# Altium PCB PDB_neeraj.PcbDoc
Units mm, origin at the board's own origin, x right, y up, seen from the top; angles counter-clockwise.
Board outline 75 x 55 mm, 2 copper layers (Top Layer, Bottom Layer); 45 components, 33 nets, 139 pads, 24 vias.
Unrouted connection lines stored in the file: 2.
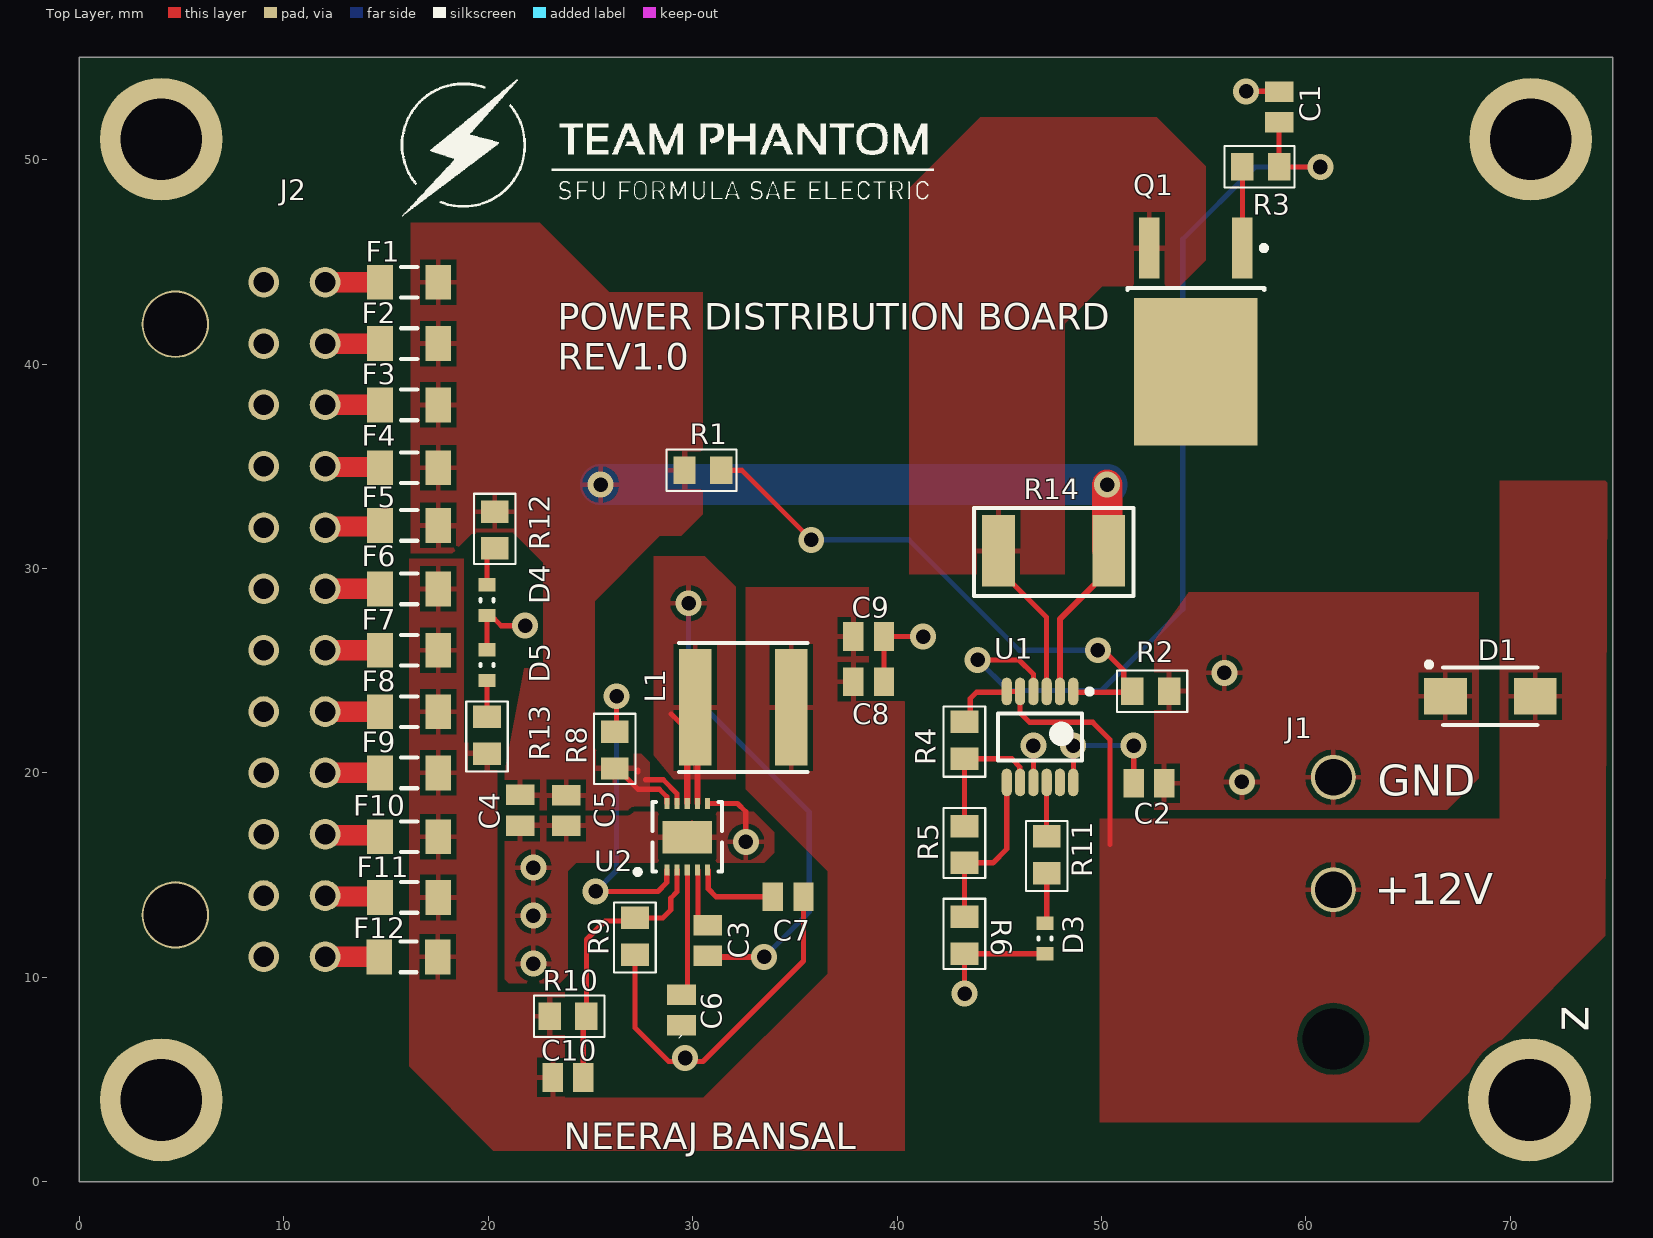
[diagram p0: Top Layer view]
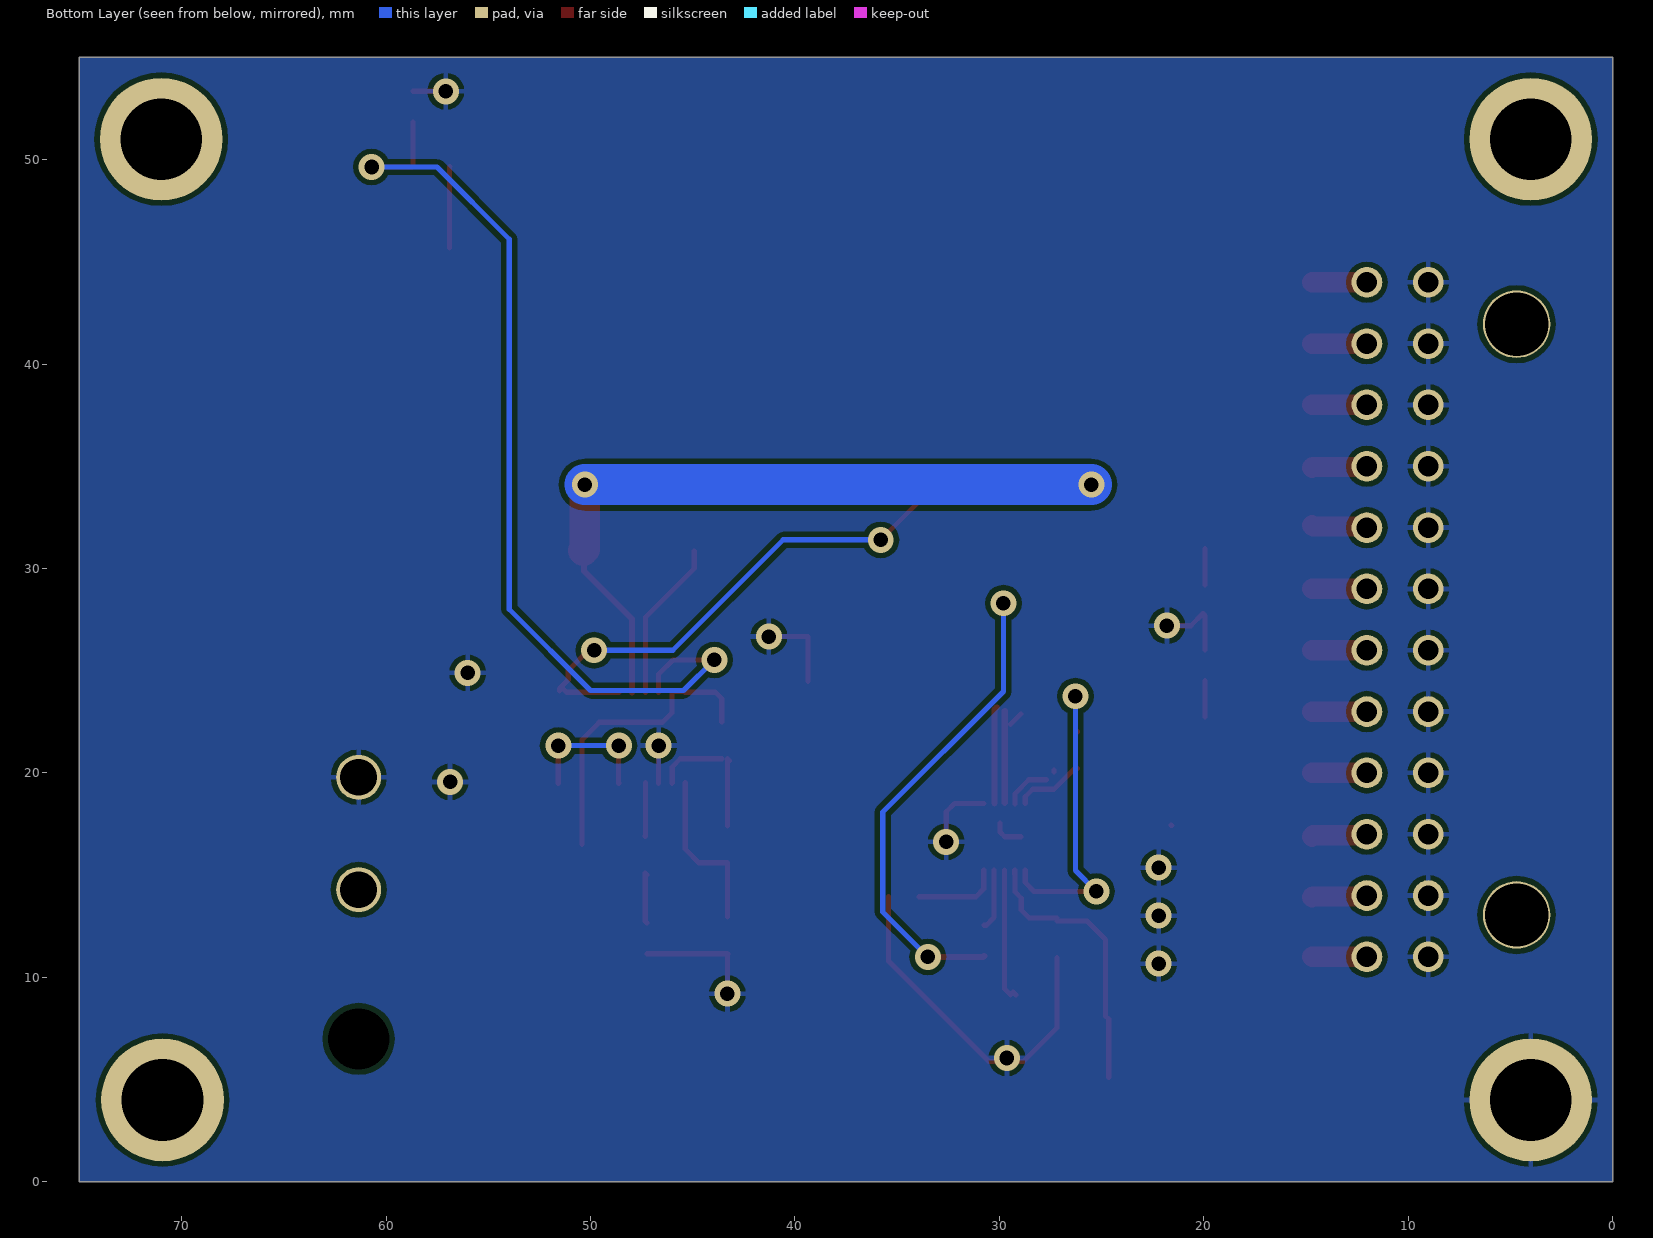
[diagram p1: Bottom Layer view, seen from below]
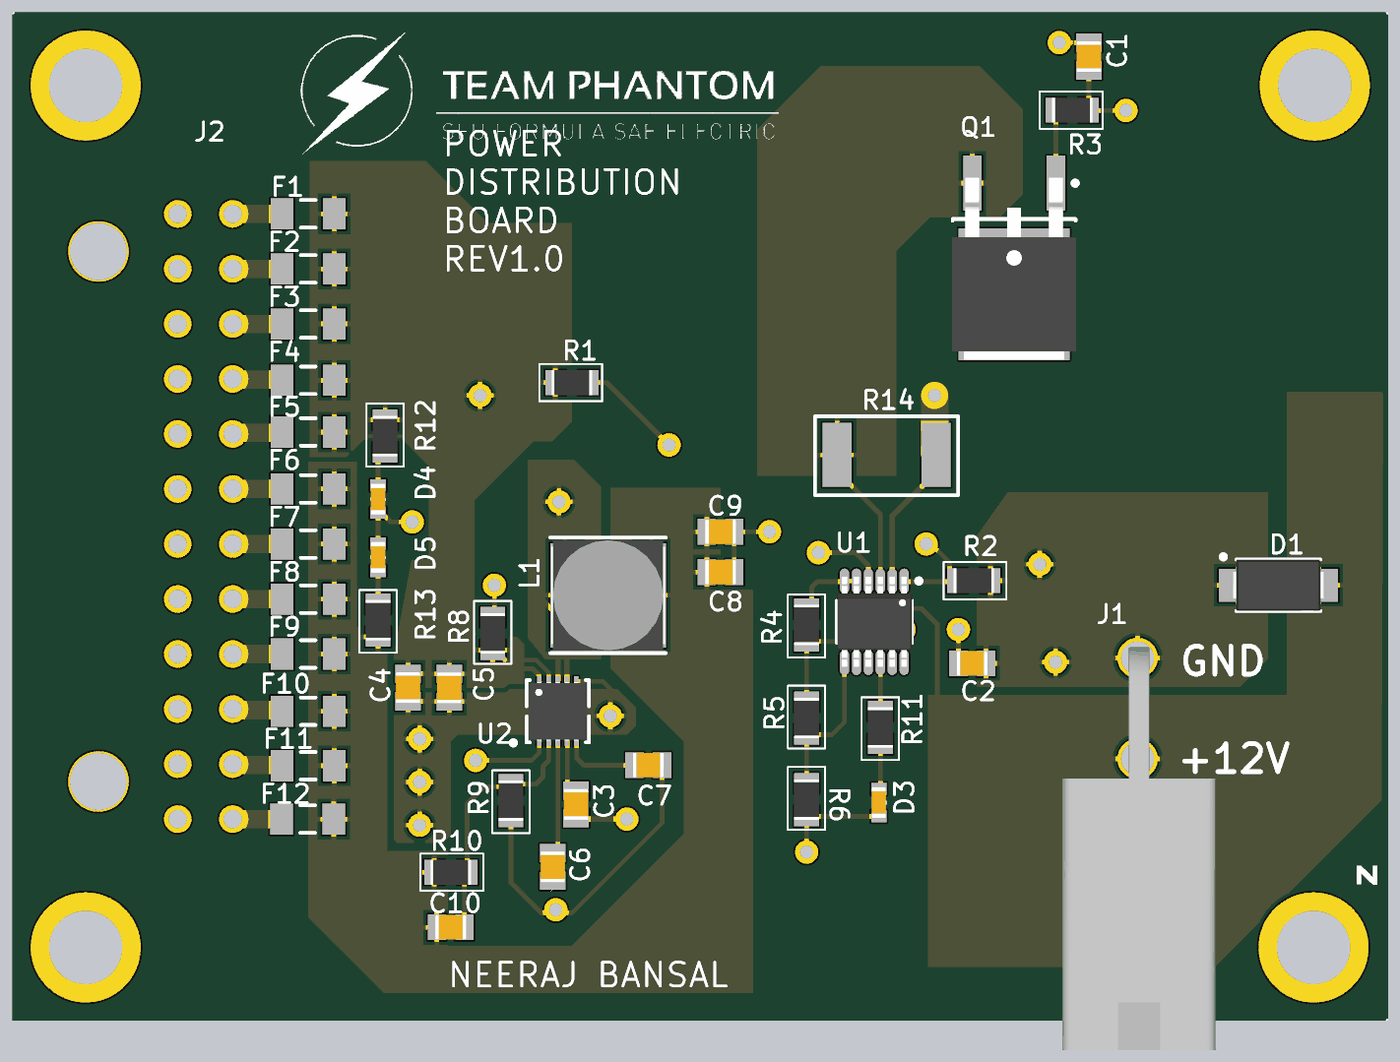
[diagram p2: 3D render of the assembled board from above, using the file's embedded part models]

## Layer stack, top to bottom
Top Solder: solder mask 0.0102, Solder Resist, Dk 3.5
Top Layer: signal copper 0.0356
Dielectric 1: dielectric 0.32, FR-4, Dk 4.8
Bottom Layer: signal copper 0.0356
Bottom Solder: solder mask 0.0102, Solder Resist, Dk 3.5

## Board outline
0,0 0,55 75,55 75,0

## Design rules (kind name [scope] priority, off if disabled: settings)
Clearance [All] p1: gap=0.254 ignorepadtopadclearanceinfootprint=TRUE except(0: Arc-Hole Track-Hole SMDPad-Hole THPad-Hole Via-Hole Fill-Hole Poly-Hole Region-Hole Text-Hole; 0.1: Arc-Arc Arc-Track Arc-SMDPad Track-Track Track-SMDPad SMDPad-SMDPad Fill-Fill Fill-Poly Fill-Region Poly-Poly Poly-Region Region-Region)
PolygonConnect [All] p1: connectstyle=Relief reliefconductorwidth=0.254 reliefentries=4 polygonreliefangle="90 Angle" airgapwidth=0.254
RoutingVias [All] p1: holewidth=0.711 width=1.27 viastyle="Through Hole" minholewidth=0.711 minwidth=1.27 maxholewidth=0.711 maxwidth=1.27
SolderMaskExpansion [All] p1: expansion=0.102
Width [All] p1: maxlimit=2 minlimit=0.254 preferedwidth=0.254 minimp=50.000000 maximp=50.000000 favimp=50.000000
30 further rules are at their usual default settings.

## Components (designator, comment, footprint, x,y, rotation, side; value= is the part's Value field where it differs from the comment)
C1 "47nF" CAPC1613X09N 58.685,52.578 r270 top
C2 "0.1uF C" CAPC1613X09N 52.324,19.492 r180 top
C3 "100nF 25V" CAPC1613X09N 30.736,11.8 r270 top
C4 "10uF" CAPC1613X09N 21.57,18.172 r90 top
C5 "10uF" CAPC1613X09N 23.822,18.161 r90 top
C6 "1uF" CAPC1613X09N 29.456,8.4 r90 top
C7 "47nF" CAPC1613X09N 34.671,13.94 r180 top
C8 "22uF 10V" CAPC1613X09N 38.608,24.466 r180 top
C9 "22uF 10V" CAPC1613X09N 38.608,26.67 r180 top
C10 "10pF" CAPC1613X09N 23.9,5.1 r180 top
D1 "TVS DIODE" DIODE_TVS 69.015,23.749 r0 top
D3 "Red" LED2 47.237,11.9 r270 top
D4 "GREEN" LED2 19.939,28.448 r270 top
D5 "GREEN" LED2 19.939,25.273 r90 top
F1 "Fuse_5A" FUSE 16.129,44 r0 top
F2 "Fuse_1A" FUSE 16.129,41 r0 top
F3 "Fuse_1A" FUSE 16.129,38 r0 top
F4 "Fuse_1A" FUSE 16.129,34.925 r0 top
F5 "Fuse_1A" FUSE 16.129,32.106 r0 top
F6 "Fuse_1A" FUSE 16.129,29 r0 top
F7 "Fuse_1A" FUSE 16.129,26 r0 top
F8 "Fuse_1A" FUSE 16.129,22.987 r0 top
F9 "Fuse_1A" FUSE 16.129,20 r0 top
F10 "Fuse_1A" FUSE 16.129,16.88 r0 top
F11 "Fuse_1A" FUSE 16.129,13.907 r0 top
F12 "Fuse_1A" FUSE 16.1,11 r0 top
J1 "0768250002" MOLEX_2PIN_MEGAFIT 61.341,6.985 r0 top
J2 "5-794620-4" PDB_OUT 0.097,47.5 r270 top
L1 "3.3uH" IND-6mm 32.475,23.2 r180 top
Q1 "IRLR2908TRLPBF" DPAK 54.61,41.574 r270 top
R1 "42K" R0805 30.5,34.8 r0 top
R2 "5K" R0805 52.414,24.003 r180 top
R3 "10 ohm" R0805 57.785,49.657 r0 top
R4 "100K R" R0805 43.295,21.59 r90 top
R5 "20k" R0805 43.295,16.5 r270 top
R6 "10K" R0805 43.295,12.065 r270 top
R8 "10k" R0805 26.186,21.115 r270 top
R9 "22.1k" R0805 27.178,12.007 r90 top
R10 "124k" R0805 23.9,8.1 r180 top
R11 "665" R0805 47.319,15.997 r90 top
R12 "2.2k" R0805 20.32,31.877 r270 top
R13 "1k" R0805 19.939,21.844 r90 top
R14 "0.01OHM" R2512 47.658,30.861 r180 top
U1 "LT4363" TSOP65P490X110-12N 46.99,21.757 r270 top
U2 "AP65550FN-7" DFN-10 29.734,16.88 r0 top

## Footprints (in the part's own frame and the unit in brackets; to place one, negate y for a bottom-side part, rotate by r counter-clockwise, add the part's x,y. Pads: shape width x height; smd on the part's side, far side on the other; paste and mask are expansions set on the pad)
CAPC1613X09N [mm] "Chip Capacitor, 2-Leads, Body 1.60x1.30mm, IPC Medium Density"
  rect 1x1.4 smd: 1(-0.75,0) 2(0.75,0)
  body extent -0.85,-0.67 0.85,0.67, height 0.9
DFN-10 [mm] "QFN, 10-Leads, Body 3.00x3.00mm, Pitch 0.50mm, Thermal Pad 2.40x1.60mm, IPC Medium Density"
  rect 0.25x0.55 smd: 1(-1,-1.625) 2(-0.5,-1.625) 3(0,-1.625) 4(0.5,-1.625) 5(1,-1.625) 6(1,1.625) 7(0.5,1.625) 8(0,1.625) 9(-0.5,1.625) 10(-1,1.625)
  rect 2.4x1.6 smd: 11(0,-0.025)
  silkscreen extent -2.55,-1.85 1.7,1.7, body extent -1.55,-1.6 1.55,1.6, height 0.63
DIODE_TVS [mm] "Molded Diode, 2-Leads, Body 4.29x2.59mm, IPC Medium Density"
  rect 2.1x1.8 smd: 1(-2.2,0) 2(2.2,0)
  silkscreen extent -3.12,-1.4 2.3,1.67, body extent -2.52,-1.4 2.52,1.4, height 2.29
DPAK [mm] "D-PAK, 3-Pads, Body 6.21x6.73mm (max), IPC Medium Density"
  rect 3x1 smd: 1(-4.1,2.28) 3(-4.1,-2.28)
  rect 7.2x6.05 smd: 4(1.95,0)
  silkscreen extent -4.22,-3.35 -2.05,3.46, body extent -4.39,-3.37 5.52,3.37, height 2.52
FUSE [mm] "Chip Diode, 2-Leads, Body 3.18x1.52mm, IPC Medium Density"
  rect 1.25x1.7 smd: 1(-1.425,0) 2(1.425,0)
  silkscreen extent -0.4,-0.75 0.4,0.75, body extent -1.65,-0.82 1.65,0.82, height 1.15
IND-6mm [mm] "Precision Wire Wound Inductor, 2-Leads, Body 6.00x6.00mm, IPC Medium Density"
  rect 1.6x5.7 smd: 1(-2.35,0) 2(2.35,0)
  silkscreen extent -3.15,-3.15 3.15,3.15, body extent -3.1,-3 3.1,3, height 4.6
LED2 [mm] "Chip Capacitor, 2-Leads, Body 1.60x0.70mm, IPC Medium Density"
  rect 0.65x0.85 smd: 1(-0.75,0) 2(0.75,0)
  silkscreen extent -0.05,-0.33 0.05,0.33, body extent -0.85,-0.4 0.85,0.4, height 0.8
MOLEX_2PIN_MEGAFIT [mm]
  round 2.2 hole 1.8: 1(0,7.3) 2(0,12.8)
  round 0 hole 3: ""(0,0)
  body extent -4.1,-8.58 4.25,13.38, height 14.75
PDB_OUT [mm]
  round 1.5 hole 1: 1(3.5,11.92) 2(6.5,11.92) 3(9.5,11.92) 4(12.5,11.92) 5(15.5,11.92) 6(18.5,11.92) 7(21.5,11.92) 8(24.5,11.92) 9(27.5,11.92) 10(30.5,11.92) 11(33.5,11.92) 12(36.5,11.92) 13(36.5,8.92) 14(33.5,8.92) 15(30.5,8.92) 16(27.5,8.92) 17(24.5,8.92) 18(21.5,8.92) 19(18.5,8.92) 20(15.5,8.92) 21(12.5,8.92) 22(9.5,8.92) 23(6.5,8.92) 24(3.5,8.92)
  round 3.3 hole 3.1: 27(5.55,4.6) 27(34.45,4.6)
  body extent 0,0 40,12.24, height 7.37
R0805 [mm] "Chip Resistor, 2-Leads, Body 2.09x1.30mm, IPC Medium Density"
  rect 1.1x1.35 smd: 1(-0.9,0) 2(0.9,0)
  silkscreen extent -1.78,-1.02 1.65,1.02, body extent -1.1,-0.67 1.1,0.67, height 0.6
R2512 [mm]
  rect 1.6x3.5 smd: 1(-2.7,0) 2(2.7,0)
  silkscreen extent -3.9,-2.1 3.9,2.2
TSOP65P490X110-12N [mm] "TSOP, 12-Leads, Body 4.04x3.00mm, Pitch 0.65mm, IPC Medium Density"
  oval 1.35x0.5 smd: 1(-2.225,1.625) 2(-2.225,0.975) 3(-2.225,0.325) 4(-2.225,-0.325) 5(-2.225,-0.975) 6(-2.225,-1.625) 7(2.225,-1.625) 8(2.225,-0.975) 9(2.225,-0.325) 10(2.225,0.325) 11(2.225,0.975) 12(2.225,1.625)
  silkscreen extent -2.35,-2.05 1.15,2.55, body extent -2.45,-2.05 2.45,2.05, height 1.1

## Part data
C1 C7: library part GCM188R71H473KA55D, "CAP CER 0.047UF 50V X7R 0603", Case/Package=0603, Case Code (Metric)=1608, Dielectric=X7R, Manufacturer=Murata, Max Operating Temperature=125°C, Min Operating Temperature=-55°C, Package Quantity=1, Ratings=AEC-Q200, Supplier Part Number 1=490-4934-1-ND, Tolerance=10%, Voltage=50V, Capacitance=47nF, Case Code (Imperial)=0603, Depth=0.8mm, Height=0.8mm, Lead Free="Lead Free", Length=1.6mm, Manufacturer Part Number=GCM188R71H473KA55D, Mount="Surface Mount", Packaging="Tape and Reel", Pricing 1="1=0.16, 10=0.115, 100=0.054, 500=0.03788, 1000=0.03136 (USD)", Radiation Hardening=No, REACH SVHC="No SVHC", Stock 1=40000, Supplier 1=Digi-Key, Termination=SMD/SMT, Thickness=0.035inch, Voltage Rating=50V, Voltage Rating (DC)=50V, Width=0.031inch
C2: library part CL05A104KA5NNNC, "Cap Ceramic 0.1uF 25V X5R 10% SMD 0402 85C Paper T/R", Capacitance=100nF, Case/Package=0402, Case Code (Metric)=1005, Dielectric=X5R, Manufacturer=Samsung, Max Operating Temperature=85°C, Min Operating Temperature=-55°C, Package Quantity=1, Supplier Part Number 1=1276-1043-6-ND, Tolerance=10%, Voltage=25V, Case Code (Imperial)=0402, Depth=0.5mm, Height=0.5mm, Lead Free="Lead Free", Length=1mm, Manufacturer Part Number=CL05A104KA5NNNC, Mount="Surface Mount", Packaging="Tape and Reel", Pricing 1="1=0.1, 10=0.032, 100=0.0141, 500=0.01006, 1000=0.00791, 2500=0.00719, 5000=0.00661 (USD)", Radiation Hardening=No, Stock 1=100000, Supplier 1=Digi-Key, Thickness=0.022inch, Voltage Rating=25V, Voltage Rating (DC)=25V, Width=0.02inch
C3 C4 C5 C6 C8 C9 C10: library part GCM188R71H473KA55D, "CAP CER 0.047UF 50V X7R 0603", Capacitance=47nF, Case/Package=0603, Case Code (Metric)=1608, Dielectric=X7R, Manufacturer=Murata, Max Operating Temperature=125°C, Min Operating Temperature=-55°C, Package Quantity=1, Ratings=AEC-Q200, Supplier Part Number 1=490-4934-1-ND, Tolerance=10%, Voltage=50V, Case Code (Imperial)=0603, Depth=0.8mm, Height=0.8mm, Lead Free="Lead Free", Length=1.6mm, Manufacturer Part Number=GCM188R71H473KA55D, Mount="Surface Mount", Packaging="Tape and Reel", Pricing 1="1=0.16, 10=0.115, 100=0.054, 500=0.03788, 1000=0.03136 (USD)", Radiation Hardening=No, REACH SVHC="No SVHC", Stock 1=40000, Supplier 1=Digi-Key, Termination=SMD/SMT, Thickness=0.035inch, Voltage Rating=50V, Voltage Rating (DC)=50V, Width=0.031inch
D1: library part SMAJ58A-13-F, "TVS DIODE 58VWM 93.6VC SMA", Breakdown Voltage=64.4V, Capacitance=180pF, Case/Package=SMA, Clamping Voltage=93.6V, Current=43A, Forward Voltage=3.5V, Leakage Current=5uA, Manufacturer=Diodes, Max Breakdown Voltage=71.2V, Max Operating Temperature=150°C, Max Output Current=4.3A, Max Power Dissipation=400W, Max Surge Current=40A, Min Operating Temperature=-55°C, Package Quantity=5000, Power Line Protection=No, Reverse Standoff Voltage=58V, Supplier Part Number 1=SMAJ58A-13-FDIDKR-ND, Test Current=1mA, Composition=Zener, Contact Plating=Matte,Tin, Direction=Unidirectional, Element Configuration=Single, ESD Protection=No, Height=2.3mm, Lead Free="Lead Free", Length=2.92mm, Manufacturer Part Number=SMAJ58A-13-F, Max Reverse Leakage Current=5uA, Min Breakdown Voltage=64.4V, Mount="Surface Mount", Number of Elements=1, Number of Pins=2, Number of Unidirectional Channels=1, Packaging="Tape and Reel", Peak Pulse Current=4.3A, Peak Pulse Power=400W, Polarity=Unidirectional, Power Dissipation=400W, Pricing 1="1=0.41, 10=0.311, 100=0.1937, 500=0.13256, 1000=0.10197 (USD)", Radiation Hardening=No, Reverse Breakdown Voltage=64.4V, Stock 1=387453, Supplier 1=Digi-Key, Termination=SMD/SMT, Voltage=58V, Width=4.6mm, Working Voltage=58V
D3: library part 150060VS75000, "LED RED CLEAR 0603 SMD", Case/Package=0603, Case Code (Metric)=1608, Colour=Green, Forward Current=30mA, Forward Voltage=2V, Manufacturer="Wurth Electronics", Max Operating Temperature=85°C, Min Operating Temperature=-40°C, Package Quantity=1, Supplier Part Number 1=732-4980-1-ND, Test Current=20mA, Case Code (Imperial)=0603, ComponentLink1Description=http://www.farnell.com/datasheets/1911347.pdf, ComponentLink1URL=http://www.farnell.com/datasheets/1911347.pdf, ComponentLink2Description=https://katalog.we-online.de/led/datasheet/150060VS75000.pdf, ComponentLink2URL=https://katalog.we-online.de/led/datasheet/150060VS75000.pdf, ComponentLink3Description=https://www.distrelec.biz/Web/Downloads/_t/ds/150060VS75000_eng_tds.pdf?mime=application%2Fpdf, ComponentLink3URL=https://www.distrelec.biz/Web/Downloads/_t/ds/150060VS75000_eng_tds.pdf?mime=application%2Fpdf, ComponentLink4Description=http://www.produktinfo.conrad.com/datenblaetter/750000-774999/759431-da-01-en-CHIPLED_0603_W_KL_H_GRUEN_150060VS7500.pdf, ComponentLink4URL=http://www.produktinfo.conrad.com/datenblaetter/750000-774999/759431-da-01-en-CHIPLED_0603_W_KL_H_GRUEN_150060VS7500.pdf, Dominant Wavelength=570nm, Height=0.7mm, Length=1.6mm, Lens Style=Clear,Rectangular, Luminous Intensity=40mcd, Manufacturer Part Number=150060VS75000, Mount="Surface Mount", Number of Pins=2, Packaging="Tape and Reel", Pricing 1="1=0.14, 50=0.129, 100=0.11, 500=0.095 (USD)", REACH SVHC=Unknown, Stock 1=219425, Supplier 1=Digi-Key, Viewing Angle=140°, Wavelength=570nm, Width=0.8mm
D4 D5: library part 150060VS75000, "LED GREEN CLEAR 0603 SMD", Case/Package=0603, Case Code (Metric)=1608, Colour=Green, Forward Current=30mA, Forward Voltage=2V, Manufacturer="Wurth Electronics", Max Operating Temperature=85°C, Min Operating Temperature=-40°C, Package Quantity=1, Supplier Part Number 1=732-4980-1-ND, Test Current=20mA, Case Code (Imperial)=0603, ComponentLink1Description=http://www.farnell.com/datasheets/1911347.pdf, ComponentLink1URL=http://www.farnell.com/datasheets/1911347.pdf, ComponentLink2Description=https://katalog.we-online.de/led/datasheet/150060VS75000.pdf, ComponentLink2URL=https://katalog.we-online.de/led/datasheet/150060VS75000.pdf, ComponentLink3Description=https://www.distrelec.biz/Web/Downloads/_t/ds/150060VS75000_eng_tds.pdf?mime=application%2Fpdf, ComponentLink3URL=https://www.distrelec.biz/Web/Downloads/_t/ds/150060VS75000_eng_tds.pdf?mime=application%2Fpdf, ComponentLink4Description=http://www.produktinfo.conrad.com/datenblaetter/750000-774999/759431-da-01-en-CHIPLED_0603_W_KL_H_GRUEN_150060VS7500.pdf, ComponentLink4URL=http://www.produktinfo.conrad.com/datenblaetter/750000-774999/759431-da-01-en-CHIPLED_0603_W_KL_H_GRUEN_150060VS7500.pdf, Dominant Wavelength=570nm, Height=0.7mm, Length=1.6mm, Lens Style=Clear,Rectangular, Luminous Intensity=40mcd, Manufacturer Part Number=150060VS75000, Mount="Surface Mount", Number of Pins=2, Packaging="Tape and Reel", Pricing 1="1=0.14, 50=0.129, 100=0.11, 500=0.095 (USD)", REACH SVHC=Unknown, Stock 1=219425, Supplier 1=Digi-Key, Viewing Angle=140°, Wavelength=570nm, Width=0.8mm
F1: library part "Fuse 2", "0466005.NR FUSE BOARD MNT 5A 32VAC/VDC 1206", LatestRevisionDate=17-Jul-2002, LatestRevisionNote="Re-released for DXP Platform.", PackageDescription="Thru-Hole; 2 Leads", PackageReference=PIN-W2/E2.8, Published=8-Jun-2000, Publisher="Altium Limited"
F2 F3 F4 F5 F6 F7 F8 F9 F10 F11 F12: library part "Fuse 2", "0466001.NR FUSE BOARD MNT 1A 63VAC/VDC 1206", LatestRevisionDate=17-Jul-2002, LatestRevisionNote="Re-released for DXP Platform.", PackageDescription="Thru-Hole; 2 Leads", PackageReference=PIN-W2/E2.8, Published=8-Jun-2000, Publisher="Altium Limited"
J1: "CONN_2Position_MEGAFIT Molex Through Hole, Right Angle Tin", Colour=Black, Manufacturer=Molex, Supplier Part Number 1=WM11969-ND, ComponentLink1Description=http://www.molex.com/pdm_docs/ps/PS-76823-100.pdf, ComponentLink1URL=http://www.molex.com/pdm_docs/ps/PS-76823-100.pdf, Connector Type="Male Pin", Contact Plating=Tin, Fastening Type=Ramp, Manufacturer Part Number=0768250002, Mount="Through Hole", Number of Positions=2, Number of Rows=2, Packaging=Tray, Pricing 1="1=1.08, 10=0.946, 25=0.89, 50=0.853, 100=0.816, 250=0.7418, 500=0.6676, 1000=0.5934, 2500=0.5378 (USD)", Row Spacing=0.224inch, Stock 1=2862, Supplier 1=Digi-Key, Termination=Solder
J2: "CONN HEADER R/A 24POS 3MM"
L1: library part 1264EY-3R3N=P3, "IND 3.3µH 6.5A 25.2 mOhm Max Nonstandard", Case/Package=Nonstandard, Current Rating=6.5A, DC Resistance (DCR)=25.2mR, Inductance=3.3uh, Manufacturer=Murata, Manufacturer Part Number=1264EY-3R3N=P3, Supplier Part Number 1=490-10821-1-ND, Test Frequency=100kHz, Tolerance=30%, Composition=Wirewound, Core Material=Ferrite, Height - Seated (Max)=0.198inch, Length=0.248inch, Mount="Surface Mount", Packaging="Tape and Reel", Pricing 1="1=0.51, 10=0.443, 100=0.3163, 500=0.2657 (USD)", Shielding=Shielded, Stock 1=81, Supplier 1=Digi-Key, Width=0.248inch
Q1: "MOSFET N-CH 80V 30A DPAK", Case/Package=DPAK, Continuous Drain Current (ID)=39A, Drain to Source Breakdown Voltage=80V, Drain to Source Resistance=28mR, Gate to Source Voltage (Vgs)=16V, Input Capacitance=1.89nF, Manufacturer="International Rectifier", Max Operating Temperature=175°C, Max Power Dissipation=120W, Min Operating Temperature=-55°C, On-State Resistance=28MR, Package Quantity=1, Supplier Part Number 1=IRLR2908TRLPBFDKR-ND, Threshold Voltage=1V, Drain to Source Voltage (Vdss)=80V, Element Configuration=Single, Fall Time=55ns, Height=2.26mm, Length=6.73mm, Manufacturer Part Number=IRLR2908TRLPBF, Mount="Surface Mount", Nominal Vgs=1V, Number of Elements=1, Number of Pins=3, Packaging="Tape and Reel", Power Dissipation=120W, Pricing 1="1=1.4, 10=1.239, 100=0.9794, 500=0.75958, 1000=0.59966 (USD)", Radiation Hardening=No, Rds On Max=28mR, REACH SVHC="No SVHC", Rise Time=95ns, Stock 1=4490, Supplier 1=Digi-Key, Turn-Off Delay Time=36ns, Turn-On Delay Time=12ns, Width=6.22mm
R1: library part ERA-6AEB104V, "Res Thin Film 0805 100K Ohm 0.1% 0.125W(1/8W) ±25ppm/C Molded SMD Automotive Punched T/R", Case/Package=0805, Case Code (Metric)=2012, Manufacturer=Panasonic, Max Operating Temperature=155°C, Max Power Dissipation=125mW, Min Operating Temperature=-55°C, Package Quantity=1, Resistance=100kR, Temperature Coefficient=25ppm/°C, Tolerance=0.1%, Voltage Rating=100V, Case Code (Imperial)=0805, Composition="Thin Film", Contact Plating=Tin, Depth=1.25mm, Features="Automotive AEC-Q200", Height=0.5mm, Lead Free="Lead Free", Length=2mm, Manufacturer Part Number=ERA-6AEB104V, Military Standard=Not, Mount="Surface Mount", Number of Pins=2, Number of Terminations=2, Packaging="Tape and Reel", Power Rating=125mW, Pricing 1="1=0.324, 10=0.2241, 25=0.2017, 100=0.1064, 250=0.0956, 500=0.0945, 1000=0.0477, 3000=0.0408 (USD)", Radiation Hardening=No, REACH SVHC="No SVHC", Stock 1=2428, Supplier 1=Arrow, Supplier Part Number 1=ERA-6AEB104V, Termination=Solder, Voltage Rating (DC)=100V, Width=1.25mm
R2: library part PNM0805E5001BST5_1, "Thin Film Resistors - SMD 200mW 5Kohm 0.1% 25ppm", Case/Package=0805, Case Code (Metric)=2012, Manufacturer="Vishay Dale Thin Film", Manufacturer Part Number=PNM0805E5001BST5, Max Operating Temperature=125°C, Min Operating Temperature=-55°C, Power Rating=200mW, Resistance=5kR, Supplier Part Number 1=1857222, Temperature Coefficient=25ppm/°C, Tolerance=0.1%, Voltage Rating=100V, Case Code (Imperial)=0805, Composition="Thin Film", Height=0.015inch, Length=0.08inch, Packaging="Tape and Reel", Pricing 1="1=2.59, 10=1.9, 50=1.53, 100=1.36 (GBP)", Radiation Hardening=No, REACH SVHC=Unknown, Stock 1=1231, Supplier 1=Farnell, Voltage Rating (DC)=100V, Width=0.05inch
R3: library part RL1220S-100-F, "RES SMD 10 OHM 1% 1/3W 0805", Case/Package=0805, Case Code (Metric)=2012, Manufacturer=Susumu, Max Operating Temperature=125°C, Max Power Dissipation=333mW, Min Operating Temperature=-55°C, Package Quantity=1, Power Rating=250mW, Resistance=10R, Supplier Part Number 1=754-RL1220S-100-F, Temperature Coefficient=200ppm/°C, Tolerance=1%, Voltage Rating (DC)=100V, Case Code (Imperial)=0805, Composition="Thin Film", Height=0.02inch, Lead Free="Lead Free", Length=0.079inch, Manufacturer Part Number=RL1220S-100-F, Number of Pins=2, Number of Terminations=2, Packaging="Tape and Reel", Pricing 1="1=0.34, 10=0.156, 50=0.156, 100=0.07, 1000=0.048, 10000=0.034 (USD)", REACH SVHC=Unknown, Stock 1=32764, Supplier 1=Mouser, Termination=SMD/SMT, Weight=0.000194oz, Width=0.049inch
R4: library part KTR10EZPF2203, "RES 220K OHM 1/8W 1% 0805 SMD", Case/Package=0805, Manufacturer=Rohm, Resistance=220000R, Supplier Part Number 1=RHM220KAHDKR-ND, Manufacturer Part Number=KTR10EZPF2203, Pricing 1="1=0.19, 10=0.16, 100=0.0624, 1000=0.02614, 2500=0.02396 (USD)", Stock 1=23335, Supplier 1=Digi-Key
R5 R6: library part RNCF0805DTE10K0, "Res Thin Film 0805 10K Ohm 0.5% 0.1W(1/10W) ±25ppm/C Molded SMD Paper T/R", Case/Package=0805, Case Code (Metric)=2012, Manufacturer="Stackpole Electronics", Max Operating Temperature=155°C, Max Power Dissipation=125mW, Min Operating Temperature=-55°C, Resistance=10kR, Supplier Part Number 1=RNCF0805DTE10K0DKR-ND, Temperature Coefficient=25ppm/°C, Tolerance=0.5%, Case Code (Imperial)=0805, Composition="Thin Film", Contact Plating=Matte,Tin, Depth=1.25mm, Features="Moisture Resistant", Height=0.026inch, Length=2mm, Manufacturer Part Number=RNCF0805DTE10K0, Military Standard=Not, Mount="Surface Mount", Number of Terminations=2, Packaging="Tape and Reel", Pricing 1="1=0.17, 10=0.14, 100=0.0546, 1000=0.02287, 2500=0.02096 (USD)", Radiation Hardening=No, Stock 1=377154, Supplier 1=Digi-Key, Width=0.049inch
R8: library part ERA-6AEB104V, "Res Thin Film 0805 1K Ohm 0.1% 0.125W(1/8W) ±25ppm/C Molded SMD Automotive Punched T/R", Case/Package=0805, Case Code (Metric)=2012, Manufacturer=Panasonic, Max Operating Temperature=155°C, Max Power Dissipation=125mW, Min Operating Temperature=-55°C, Package Quantity=1, Resistance=100kR, Temperature Coefficient=25ppm/°C, Tolerance=0.1%, Voltage Rating=100V, Case Code (Imperial)=0805, Composition="Thin Film", Contact Plating=Tin, Depth=1.25mm, Features="Automotive AEC-Q200", Height=0.5mm, Lead Free="Lead Free", Length=2mm, Manufacturer Part Number=ERA-6AEB104V, Military Standard=Not, Mount="Surface Mount", Number of Pins=2, Number of Terminations=2, Packaging="Tape and Reel", Power Rating=125mW, Pricing 1="1=0.324, 10=0.2241, 25=0.2017, 100=0.1064, 250=0.0956, 500=0.0945, 1000=0.0477, 3000=0.0408 (USD)", Radiation Hardening=No, REACH SVHC="No SVHC", Stock 1=2428, Supplier 1=Arrow, Supplier Part Number 1=ERA-6AEB104V, Termination=Solder, Voltage Rating (DC)=100V, Width=1.25mm
R9 R11 R12 R13: library part ERA-6AEB104V, "Res Thin Film 0805 22.1K Ohm 0.1% 0.125W(1/8W) ±25ppm/C Molded SMD Automotive Punched T/R", Case/Package=0805, Case Code (Metric)=2012, Manufacturer=Panasonic, Max Operating Temperature=155°C, Max Power Dissipation=125mW, Min Operating Temperature=-55°C, Package Quantity=1, Resistance=100kR, Temperature Coefficient=25ppm/°C, Tolerance=0.1%, Voltage Rating=100V, Case Code (Imperial)=0805, Composition="Thin Film", Contact Plating=Tin, Depth=1.25mm, Features="Automotive AEC-Q200", Height=0.5mm, Lead Free="Lead Free", Length=2mm, Manufacturer Part Number=ERA-6AEB104V, Military Standard=Not, Mount="Surface Mount", Number of Pins=2, Number of Terminations=2, Packaging="Tape and Reel", Power Rating=125mW, Pricing 1="1=0.324, 10=0.2241, 25=0.2017, 100=0.1064, 250=0.0956, 500=0.0945, 1000=0.0477, 3000=0.0408 (USD)", Radiation Hardening=No, REACH SVHC="No SVHC", Stock 1=2428, Supplier 1=Arrow, Supplier Part Number 1=ERA-6AEB104V, Termination=Solder, Voltage Rating (DC)=100V, Width=1.25mm
R10: library part ERA-6AEB104V, "Res Thin Film 0805 124K Ohm 0.1% 0.125W(1/8W) ±25ppm/C Molded SMD Automotive Punched T/R", Case/Package=0805, Case Code (Metric)=2012, Manufacturer=Panasonic, Max Operating Temperature=155°C, Max Power Dissipation=125mW, Min Operating Temperature=-55°C, Package Quantity=1, Resistance=100kR, Temperature Coefficient=25ppm/°C, Tolerance=0.1%, Voltage Rating=100V, Case Code (Imperial)=0805, Composition="Thin Film", Contact Plating=Tin, Depth=1.25mm, Features="Automotive AEC-Q200", Height=0.5mm, Lead Free="Lead Free", Length=2mm, Manufacturer Part Number=ERA-6AEB104V, Military Standard=Not, Mount="Surface Mount", Number of Pins=2, Number of Terminations=2, Packaging="Tape and Reel", Power Rating=125mW, Pricing 1="1=0.324, 10=0.2241, 25=0.2017, 100=0.1064, 250=0.0956, 500=0.0945, 1000=0.0477, 3000=0.0408 (USD)", Radiation Hardening=No, REACH SVHC="No SVHC", Stock 1=2428, Supplier 1=Arrow, Supplier Part Number 1=ERA-6AEB104V, Termination=Solder, Voltage Rating (DC)=100V, Width=1.25mm
R14: library part PE2512FKE7W0R01L, "RES SMD 0.01 OHM 1% 2W 2512", Case/Package=2512, Case Code (Metric)=6432, Manufacturer=Yageo, Max Operating Temperature=170°C, Max Power Dissipation=2W, Min Operating Temperature=-55°C, Resistance=10mR, Temperature Coefficient=50ppm/°C, Tolerance=1%, Case Code (Imperial)=2512, Composition="Metal Film", Features="Automotive AEC-Q200,Moisture Resistant", Height=0.03inch, Lead Free="Lead Free", Length=0.248inch, Manufacturer Part Number=PE2512FKE7W0R01L, Number of Terminations=2, Packaging="Tape and Reel", Pricing 1="1=0.57, 10=0.479, 25=0.4104, 50=0.3694, 100=0.3215, 250=0.28732, 500=0.23258, 1000=0.18812 (USD)", Stock 1=15960, Supplier 1=Digi-Key, Width=0.122inch
U1: library part LT4363CMS-2#PBF, "IC SURGE STOPPER HV 12-MSOP", Case/Package=MSOP, Clamping Voltage=27V, Manufacturer="Analog Devices / Linear Technology", Max Operating Temperature=70°C, Max Supply Voltage=80V, Min Operating Temperature=0°C, Min Supply Voltage=4V, Package Quantity=37, Supplier Part Number 1=LT4363CMS-2#PBF-ND, Lead Free="Lead Free", Manufacturer Part Number=LT4363CMS-2#PBF, Number of Circuits=1, Number of Pins=12, Packaging=Rail/Tube, Pricing 1="1=5.41, 25=3.6108, 100=3.0702 (USD)", REACH SVHC="No SVHC", Stock 1=1640, Supplier 1=Digi-Key, Working Voltage=80V
U2: "IC BUCK SYNC 5A, 18V VIN MAX 650kHz COT Step-Down Conv", Manufacturer=Diodes, Max Input Voltage=18V, Max Operating Temperature=85°C, Max Output Voltage=6V, Min Input Voltage=4.5V, Min Operating Temperature=-40°C, Min Output Voltage=760mV, Operating Supply Current=900uA, Output Current=5A, Package Quantity=3000, Supplier Part Number 1=AP65550FN-7DICT-ND, Switching Frequency=650kHz, Lead Free="Lead Free", Manufacturer Part Number=AP65550FN-7, Min Supply Voltage=4.5V, Mount="Surface Mount", Number of Outputs=1, Output Configuration=Positive, Output Type=Adjustable, Output Voltage=6V, Packaging="Tape and Reel", Pricing 1="1=0.77, 10=0.68, 100=0.5212, 500=0.412, 1000=0.3296 (USD)", Stock 1=135, Supplier 1=Digi-Key, Synchronous Rectifier=Yes

## Free pads (board coordinates)
  round 6 hole 4: 2(4,4) 2(4,51) 2(70.934,4) 2(71,51)

## Via types
v1: diameter 1.27, hole 0.711, Top Layer to Bottom Layer, 24 vias

## Nets (pads, with @x,y where several pads share a name; then routed paths per layer and width w, separated by ;. In a path a pad name is that pad's centre, name@x,y a point inside that pad or via, vN(x,y) a via of type N, cw(c..) or ccw(c..) an arc to the next point about the centre after c; other vN are vias at no path point)
5V_OUT: C8.2 C9.2 C10.2 F6.2 F7.2 F8.2 F9.2 F10.2 F11.2 F12.2 L1.1 R10.2 R13.1
12V_OUT: C4.2 C5.2 F1.2 F2.2 F3.2 F4.2 F5.2 R1.1 R8.2 R12.1 R14.1 U1.2 U2.9 U2.10 | length 41.8
  Top Layer w0.254: R8.2 26.311,20.215 27.326,19.2 28.363,19.2 28.732,18.831 28.732,18.507 U2.10 ; 27.326,20.039 27.326,20.131 ; 27.7,19.665 28.558,19.665 29.24,18.983 U2.9@29.24,18.49
  Top Layer w0.3: U1.2@47.965,23.942 U1.2 47.965,27.518 50.325,29.878 R14.1@50.325,30.861
  Top Layer w1.5: v1(50.278,34.1) 50.278,30.941 R14.1
  Bottom Layer w2: v1(25.5,34.1) v1(50.278,34.1)
BOOTSTRAP_5V: C3.1 U2.4 | length 3
  Top Layer w0.254: U2.4@30.258,15.253 30.258,12.923 30.631,12.55 C3.1
DRAIN: D1.2 J1.1 Q1.4 R4.2 U1.5 U1.6 | length 14.8
  Top Layer w0.254: R4.2@43.574,22.49 43.574,23.634 43.882,23.942 U1.6@45.365,23.942 ; U1.6 45.975,23.982 46.015,23.942 46.015,22.946 46.482,22.479 49.566,22.479 50.419,21.626 50.419,16.51
EN_5V: R8.1 U2.1 | length 16
  Top Layer w0.254: v1(25.257,14.2) 28.3,14.2 28.732,14.632 28.732,15.253 U2.1 ; R8.1 26.277,22.106 v1(26.277,23.749)
  Bottom Layer w0.254: v1(25.257,14.2) 26.277,15.22 v1(26.277,23.749)
FB_5V: C10.1 R9.2 R10.1 U2.2 | length 13.6
  Top Layer w0.254: C10.1 24.65,7.95 R10.1 24.8,11.846 25.716,12.762 R9.2@27.178,12.762 ; R9.2 28.533,12.907 28.926,13.3 28.926,13.867 29.24,14.182 29.24,15.043 29.242,15.045 U2.2@29.242,15.253
FLT: R11.2 U1.10 | length 2.6
  Top Layer w0.254: U1.10 47.315,16.9 R11.2
GND: C1.1 C2.1 C4.1 C5.1 C6.1 C7.1 C8.1 C9.1 D1.1 D3.2 D4.2 D5.2 J1.2 J2.13 J2.14 J2.15 J2.16 J2.17 J2.18 J2.19 J2.20 J2.21 J2.22 J2.23 J2.24 pad.2@4,4 R2.1 R6.2 R9.1 U1.9 U2.6 U2.11 | length 39.9
  Top Layer w0.254: D5.2 D4.2 20.037,27.796 20.633,27.2 v1(21.802,27.2) ; C4.1 C4.1@21.591,17.443 ; R9.1@27.178,10.962 27.178,7.535 28.829,5.884 30.51,5.884 35.421,10.795 C7.1 ; U2.11@28.956,16.88 29.734,16.88 29.964,17.11 U2.11@29.964,17.553 ; U2.6@30.765,18.505 32.195,18.505 32.6,18.1 v1(32.6,16.626) ; C8.1 C9.1 v1(41.275,26.67) ; v1(43.3,9.2) 43.3,11.108 43.269,11.139 R6.2 43.31,11.15 D3.2 ; U1.9@46.665,19.492 U1.9 v1(46.665,21.336) ; v1(57.073,53.34) 58.673,53.34 C1.1
  other v1: 29.627,6.054 22.203,10.668 22.203,13.018 22.203,15.367 56.868,19.558 56.007,24.892
IC_GATE: C1.2 R3.2 U1.4 | length 46.7
  Top Layer w0.254: v1(43.942,25.526) 45.963,25.526 46.665,24.824 U1.4@46.665,23.942 ; C1.2 R3.2 58.704,49.638 v1(60.706,49.638)
  Bottom Layer w0.254: v1(43.942,25.526) 45.442,24.026 49.994,24.026 53.975,28.007 53.975,46.101 57.512,49.638 v1(60.706,49.638)
LED_5V: D5.1 R13.2 | length 1.8
  Top Layer w0.254: R13.2 D5.1
NetD3_1: D3.1 R11.1 | length 2.6
  Top Layer w0.254: D3.1 47.319,12.731 R11.1 R11.1@47.237,15.015
NetD4_1: D4.1 R12.2 | length 1.8
  Top Layer w0.254: D4.1 R12.2@19.939,30.977
NetF1_1: F1.1 J2.1 | length 2.7
  Top Layer w1: J2.1 F1.1
NetF2_1: F2.1 J2.2 | length 2.7
  Top Layer w1: J2.2 F2.1
NetF3_1: F3.1 J2.3 | length 2.7
  Top Layer w1: J2.3 F3.1
NetF4_1: F4.1 J2.4 | length 2.7
  Top Layer w1: J2.4 12.054,34.962 14.667,34.962 F4.1
NetF5_1: F5.1 J2.5 | length 2.8
  Top Layer w0.254: F5.1@15.041,32.122 F5.1@15.057,32.106
  Top Layer w1: J2.5 12.07,32.053 14.651,32.053 F5.1
NetF6_1: F6.1 J2.6 | length 2.7
  Top Layer w1: J2.6 F6.1
NetF7_1: F7.1 J2.7 | length 2.7
  Top Layer w0.254: F7.1@14.8,25.969 F7.1@14.831,26
  Top Layer w1: J2.7 F7.1
NetF8_1: F8.1 J2.8 | length 2.8
  Top Layer w0.254: F8.1@14.791,23.065 F8.1@14.869,22.987
  Top Layer w1: J2.8 12.023,22.993 14.697,22.993 F8.1
NetF9_1: F9.1 J2.9 | length 2.7
  Top Layer w1: J2.9 F9.1
NetF10_1: F10.1 J2.10 | length 2.7
  Top Layer w1: J2.10 12.077,16.94 14.644,16.94 F10.1
NetF11_1: F11.1 J2.11 | length 2.7
  Top Layer w1: J2.11 12.063,13.954 14.658,13.954 F11.1
NetF12_1: F12.1 J2.12 | length 2.7
  Top Layer w1: J2.12 F12.1@14.704,11
NetQ1_1: Q1.1 R3.1 | length 4
  Top Layer w0.254: R3.1 56.89,49.652 Q1.1
NetR1_2: R1.2 R2.2 U1.1 | length 27.8
  Top Layer w0.254: R1.2 32.4,34.8 v1(35.8,31.4) ; U1.1@48.615,23.942 51.173,23.942 R2.2@51.436,24.206 ; v1(49.817,26) 49.911,25.906 50.178,25.906 51.091,24.993 51.091,24.551 R2.2@51.436,24.206 ; R2.2 51.514,24.128 R2.2@51.436,24.206
  Bottom Layer w0.254: v1(35.8,31.4) 40.571,31.4 45.971,26 v1(49.817,26)
OV: R5.2 R6.1 U1.7 | length 8.2
  Top Layer w0.254: R6.1 R5.2 44.683,15.6 45.365,16.282 U1.7
SNS: Q1.3 R14.2 U1.3 | length 7.9
  Top Layer w0.254: R14.2@44.925,30.861 44.925,30.005 47.315,27.615 U1.3@47.315,23.942
SS_5V: C7.2 U2.5 | length 4.2
  Top Layer w0.254: U2.5@30.766,15.253 30.766,14.319 31.145,13.94 C7.2
SW_5V: C3.2 L1.2 U2.7 U2.8 | length 33.4
  Top Layer w0.254: 28.956,22.877 L1.2@29.456,22.377
  Top Layer w0.3: U2.8@29.734,18.54 L1.2@29.734,23.026 ; L1.2 30.234,23.091 U2.7 ; C3.2 30.786,11 v1(33.5,11)
  Bottom Layer w0.254: v1(29.8,28.298) 29.8,23.983 35.7,18.083 35.7,13.2 v1(33.5,11)
TMR: C2.2 U1.12 | length 6.6
  Top Layer w0.254: U1.12@48.615,19.492 48.636,19.513 48.636,21.315 v1(48.615,21.336) ; v1@51.435,21.336 51.574,21.197 C2.2
  Bottom Layer w0.254: v1(48.615,21.336) v1@51.435,21.336
  other v1: 51.574,21.336
UV: R4.1 R5.1 U1.8 | length 6.8
  Top Layer w0.254: R4.1@43.2,20.595 R4.1 43.295,20.595 R5.1 ; R4.1@43.574,20.69 45.604,20.69 46,20.294 46,19.507 U1.8@46.015,19.492
VREG_5V: C6.2 U2.3 | length 6.4
  Top Layer w0.254: C6.2@29.2,9.15 C6.2@29.327,9.277 ; C6.2 29.75,9.444 U2.3@29.75,15.253
pads on no net: J1. J2.27 U1.11

## Polygon pours and split planes (outlines as drawn)
GND on Top Layer "GND" (solid, pour order 56): 20.8,18.101 20.8,9.9 21,9.7 23.5,9.7 23.9,10.1 23.9,15.2 24.3,15.6 33.5,15.6 34,16.1 34,17.1 32.999,18.101
12V_OUT on Top Layer "GND" (solid, pour order 54): 27.896,18.1 27.896,20.521 27.473,20.944 25.456,20.944 25.2,21.2 25.2,28.4 28.4,31.6 29.452,31.6 30.5,32.648 30.5,43.5 25.925,43.5 22.525,46.9 16.2,46.9 16.2,30.7 18.2,30.7 19.2,31.7 21.276,31.7 22.7,30.276 22.7,25.2 21.749,25.116 20.8,19.963 20.8,18.101
SNS on Top Layer "GND" (solid, pour order 52): 48.2,29.718 48.2,41.977 50.038,43.815 53.833,43.815 55.1,45.082 55.1,49.675 52.705,52.07 44.069,52.07 40.6,48.601 40.6,29.718
5V_OUT on Top Layer "GND" (solid, pour order 38): 38.608,29.075 38.608,23.512 40.358,23.512 40.386,23.484 40.386,1.524 20.256,1.524 16.129,5.651 16.129,9.271 23.749,9.271 23.749,4.1 30.516,4.1 36.6,10.184 36.6,15.2 32.6,19.2 32.6,29.075
SW_5V on Top Layer "GND" (solid, pour order 36): 28.1,20.865 28.1,30.6 30.6,30.6 32.1,29.1 32.1,19.7 29.059,19.7
GND on Top Layer "GND" (solid, pour order 18): 52.578,26.463 52.578,18.2 66.907,18.2 68.453,19.746 68.453,28.829 54.264,28.829
5V_OUT on Top Layer "GND" (solid, pour order 12): 16.129,30.48 18.796,30.48 18.796,27.178 18.796,21.463 20.447,21.463 20.447,15.24 20.447,9.271 16.129,9.271
DRAIN on Top Layer "GND" (solid, pour order 8): 74.735,34.29 69.469,34.29 69.469,17.768 49.92,17.768 49.92,12.319 49.92,2.921 56.134,2.921 65.532,2.921 74.644,12.033
GND on Bottom Layer "GND" (solid, pour order 16): 0,55 75,55 75,0 0,0

## Silkscreen, mask and mechanical layers (free items; w line width, h text height)
Top Overlay:
  drawing of 38 lines, arcs and shapes, not listed
  text "POWER DISTRIBUTION BOARD / REV1.0" at 23.4,39.728 h1.3
  text "GND" at 63.5,18.89 h1.52
  text "+12V" at 63.373,13.574 h1.52
  text "z" at 74.422,7.329 h3 r90
  text "NEERAJ BANSAL" at 23.7,1.6 h1.3

## Dimensions
75,55 to 75,0 on Top Overlay
0,55 to 75,55 on Top Overlay